# Altium PCB PCB11_VZ.PcbDoc
Units mm, origin at the board's own origin, x right, y up, seen from the top; angles counter-clockwise.
Board outline 69.98 x 50.04 mm, 2 copper layers (Top Layer, Bottom Layer); 12 components, 10 nets, 62 pads, 73 vias.
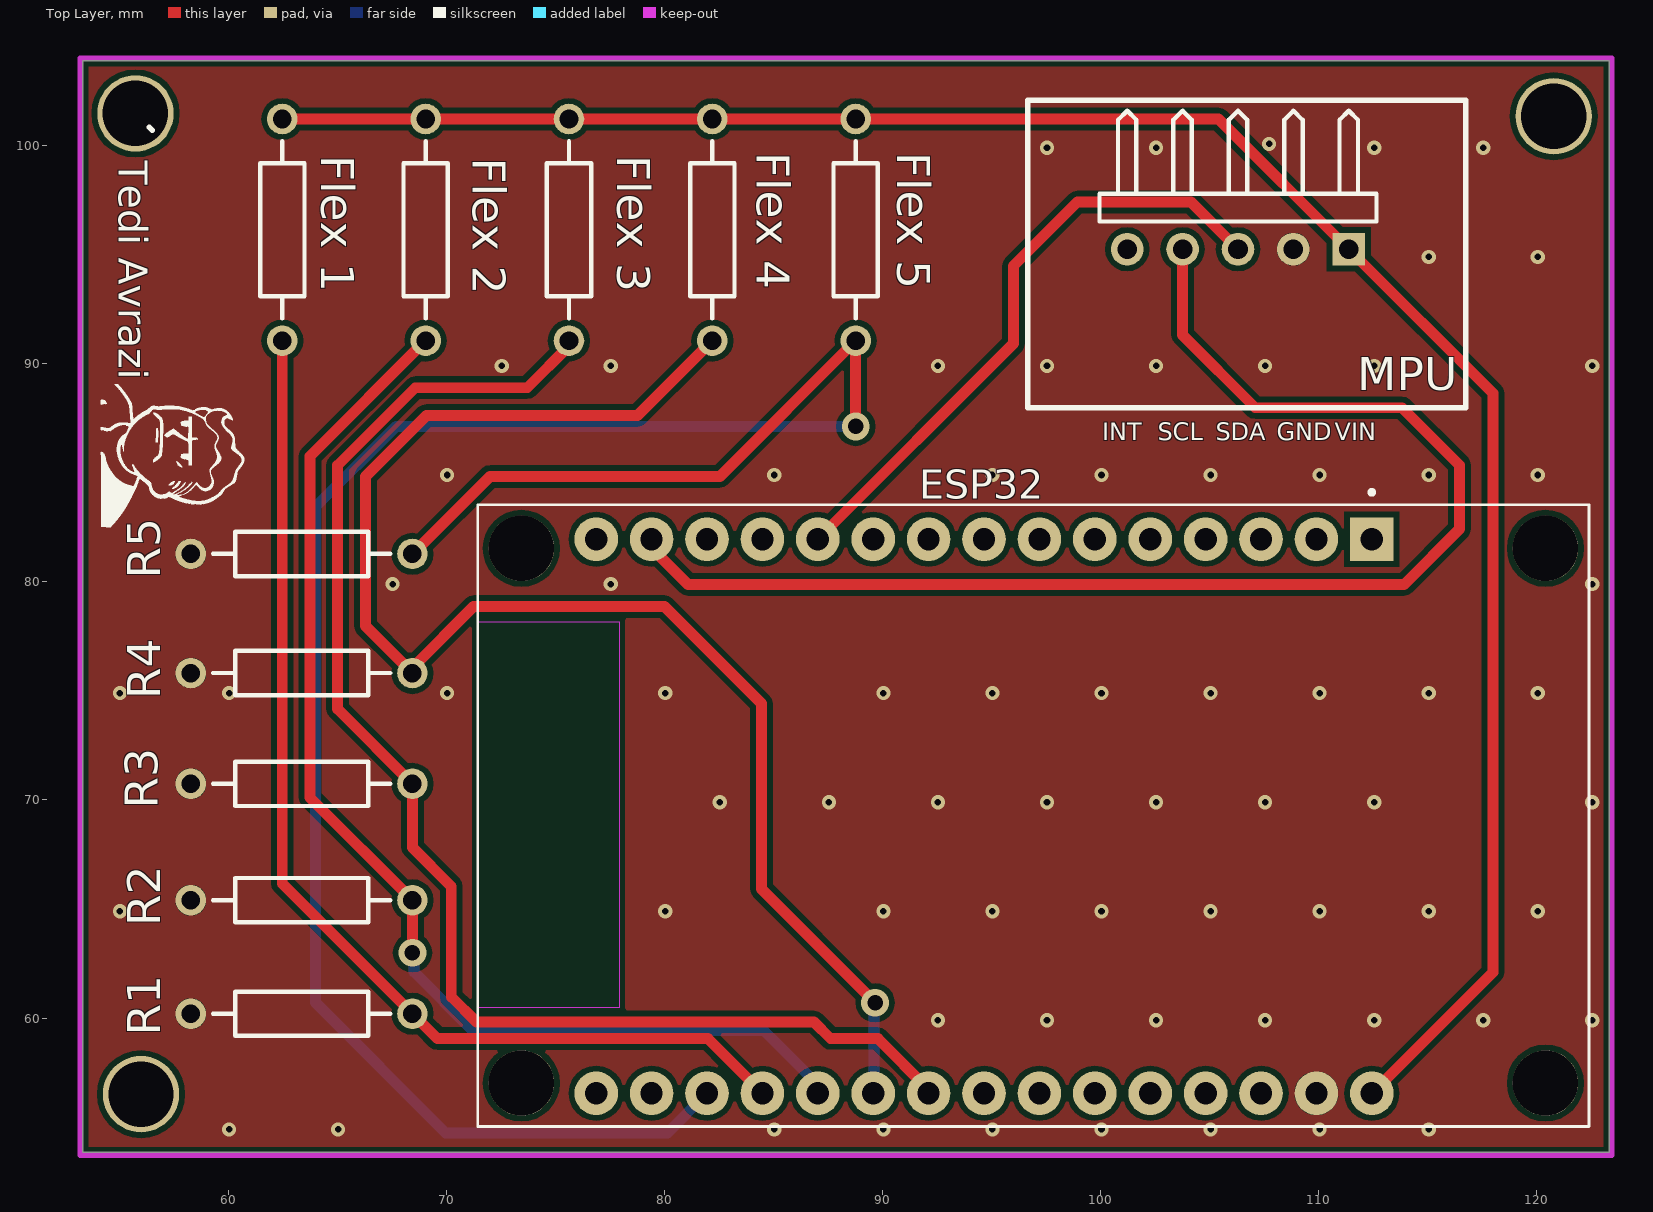
[diagram p0: Top Layer view]
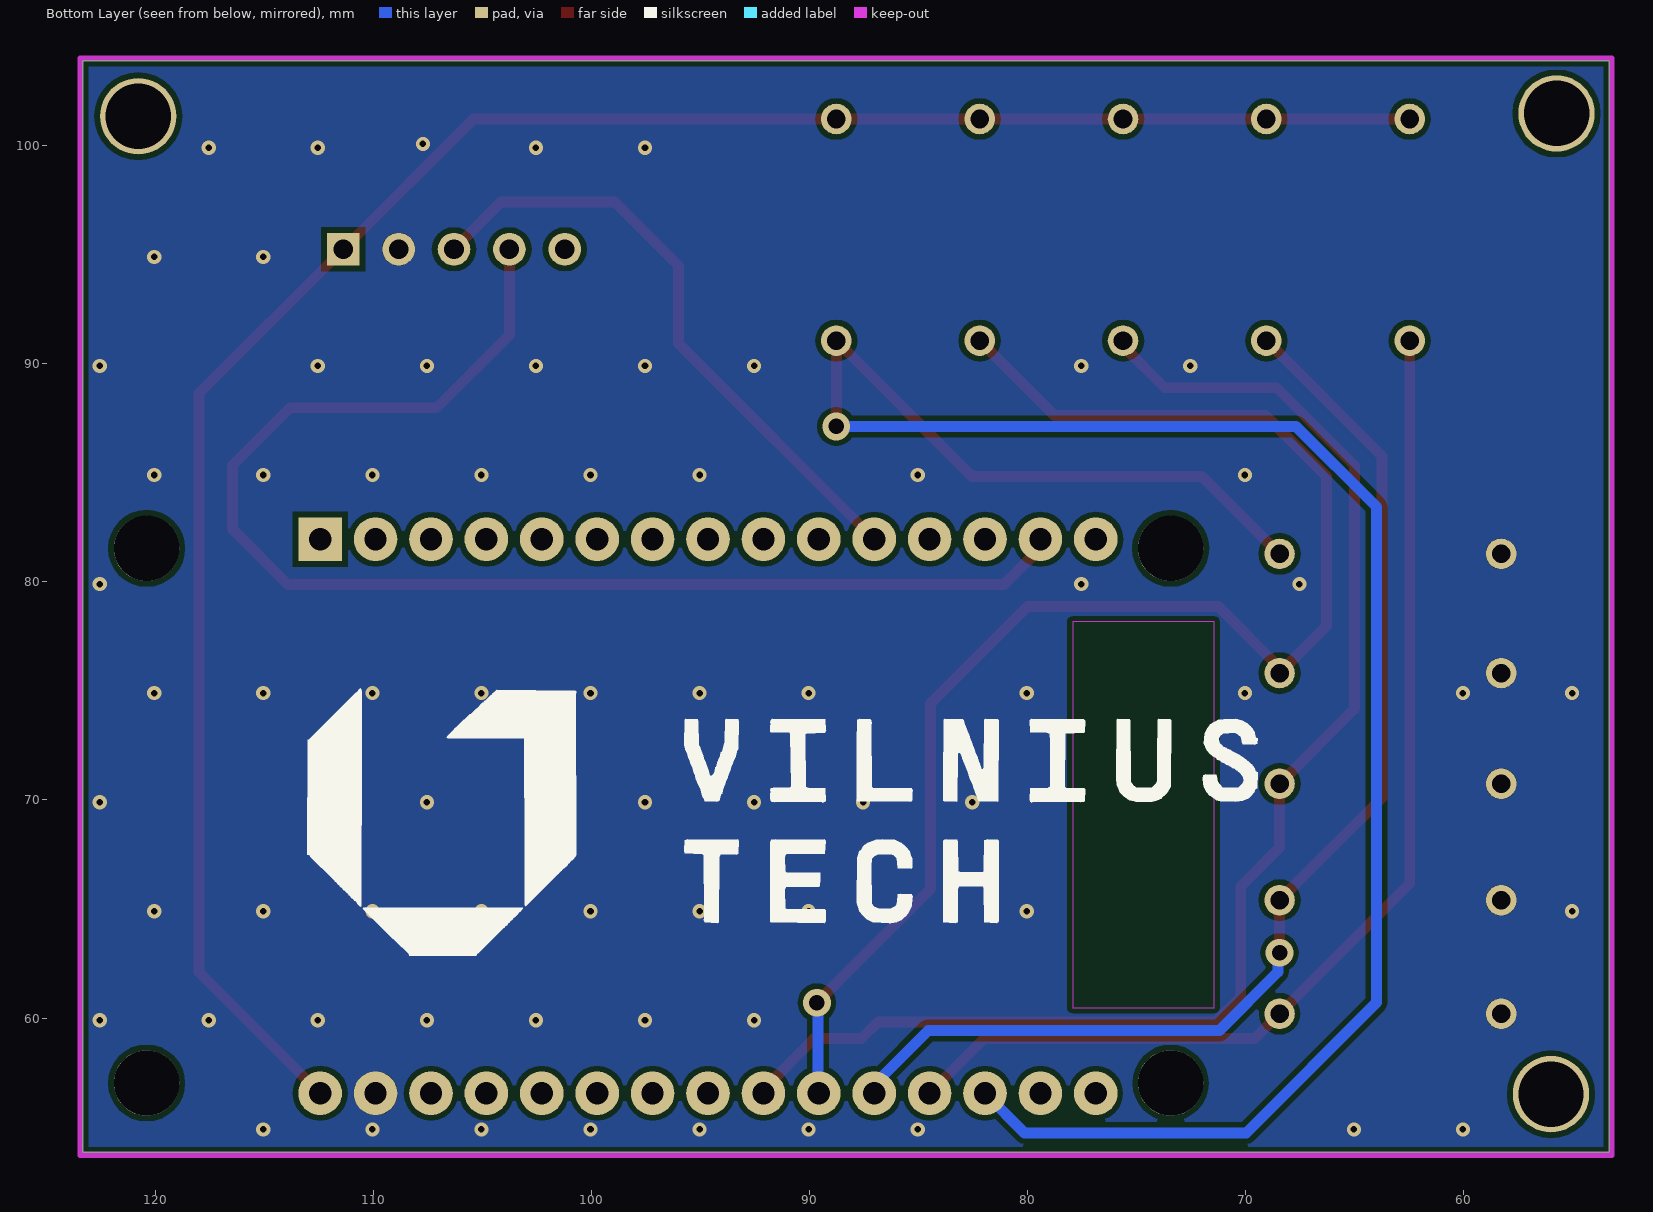
[diagram p1: Bottom Layer view, seen from below]

## Layer stack, top to bottom
Top Solder: solder mask 0.0102, Solder Resist, Dk 3.5
Top Layer: signal copper 0.0356
Dielectric 1: dielectric 0.32, FR-4, Dk 4.8
Bottom Layer: signal copper 0.0356
Bottom Solder: solder mask 0.0102, Solder Resist, Dk 3.5

## Board outline
53.34,53.848 53.34,103.886 123.317,103.886 123.317,53.848

## Design rules (kind name [scope] priority, off if disabled: settings)
Clearance [All] p1: gap=0.254 ignorepadtopadclearanceinfootprint=FALSE except(0: Arc-Hole Track-Hole SMDPad-Hole THPad-Hole Via-Hole Fill-Hole Poly-Hole Region-Hole Text-Hole)
HoleSize [All] p1: absolutevalues=TRUE maxlimit=3 minlimit=0.025 maxpercent=80.000 minpercent=20.000
PolygonConnect [IsVia] p1: connectstyle=Direct reliefconductorwidth=0.254 reliefentries=4 polygonreliefangle="90 Angle" airgapwidth=0.254
RoomDefinition ThesisSchematic [InComponentClass('ThesisSchematic')] p1: confinementstyle=ConfineIn formatcopy=TRUE lockcomponents=FALSE outline 0,0 50.8,0 50.8,25.4 0,25.4
RoutingVias [All] p1: holewidth=0.711 width=1.27 viastyle="Through Hole" minholewidth=0.711 minwidth=1.27 maxholewidth=0.711 maxwidth=1.27
SilkToSolderMaskClearance [IsPad] p1: minsilkscreentomaskgap=0.1 clearancetoexposedcopper=TRUE
SolderMaskExpansion [All] p1: expansion=0.102 istentingtop=FALSE
Width [All] p1: maxlimit=0.55 minlimit=0.5 preferedwidth=0.5
28 further rules are at their usual default settings.

## Components (designator, comment, footprint, x,y, rotation, side; value= is the part's Value field where it differs from the comment)
ESP32 "ESP32-DEVKIT-V1" MODULE_ESP32_DEVKIT_V1 96.921,69.253 r270 top (schematic designator Microcontroller1)
"Flex 1" "Res Adj2" AXIAL-0.4 62.484,96.139 r90 top value=12K
"Flex 2" "Res Adj2" AXIAL-0.4 69.056,96.139 r90 top value=12K
"Flex 3" "Res Adj2" AXIAL-0.4 75.629,96.139 r90 top value=12K
"Flex 4" "Res Adj2" AXIAL-0.4 82.201,96.139 r90 top value=12K
"Flex 5" "Res Adj2" AXIAL-0.4 88.773,96.139 r90 top value=12K
MPU "MPU" HDR1X5H 111.379,95.25 r180 top (schematic designator P1)
R1 "Res2" AXIAL-0.4 63.373,60.198 r0 top value=10K
R2 "Res2" AXIAL-0.4 63.373,65.405 r0 top value=10K
R3 "Res2" AXIAL-0.4 63.373,70.739 r0 top value=10K
R4 "Res2" AXIAL-0.4 63.373,75.819 r0 top value=10K
R5 "Res2" AXIAL-0.4 63.373,81.28 r0 top value=10K

## Footprints (in the part's own frame and the unit in brackets; to place one, negate y for a bottom-side part, rotate by r counter-clockwise, add the part's x,y. Pads: shape width x height; smd on the part's side, far side on the other; paste and mask are expansions set on the pad)
AXIAL-0.4 [mm] "Axial Device, Thru-Hole; 2 Leads; 0.4 in Pin Spacing"
  round 1.4 hole 0.85: 1(-5.08,0) 2(5.08,0)
  silkscreen extent -4.06,-1.02 4.06,1.02
HDR1X5H [mm] "Connector; Header; 5 Position; Right Angle"
  rect 1.5x1.5 hole 0.9: 1(0,0)
  round 1.5 hole 0.9: 2(2.54,0) 3(5.08,0) 4(7.62,0) 5(10.16,0)
  silkscreen extent -1.27,-6.35 11.43,-1.27
MODULE_ESP32_DEVKIT_V1 [mm]
  rect 2x2 hole 1.02: 1(-12.7,15.515)
  round 2 hole 1.02: 2(-12.7,12.975) 3(-12.7,10.435) 4(-12.7,7.895) 5(-12.7,5.355) 6(-12.7,2.815) 7(-12.7,0.275) 8(-12.7,-2.265) 9(-12.7,-4.805) 10(-12.7,-7.345) 11(-12.7,-9.885) 12(-12.7,-12.425) 13(-12.7,-14.965) 14(-12.7,-17.505) 15(-12.7,-20.045) 16(12.7,-20.045) 17(12.7,-17.505) 18(12.7,-14.965) 19(12.7,-12.425) 20(12.7,-9.885) 21(12.7,-7.345) 22(12.7,-4.805) 23(12.7,-2.265) 24(12.7,0.275) 25(12.7,2.815) 26(12.7,5.355) 27(12.7,7.895) 28(12.7,10.435) 29(12.7,12.975) 30(12.7,15.515)
  round 3 hole 3 unplated: ""(-12.28,23.475) ""(-12.28,-23.475) ""(12.23,23.475) ""(12.23,-23.475)
  Keep-Out Layer region: 8.78,-25.475 -8.91,-25.475 -8.91,-18.985 8.78,-18.985
  Keep-Out Layer region: 8.78,-25.475 -8.91,-25.475 -8.91,-18.985 8.78,-18.985
  Keep-Out Layer region: 8.78,-25.475 -8.91,-25.475 -8.91,-18.985 8.78,-18.985
  silkscreen extent -14.95,-25.48 14.23,25.48

## Part data
ESP32: library part CMP-003-000000-1, "Dual core, Wi-Fi: 2.4 GHz up to 150 Mbits/s,BLE (Bluetooth Low Energy) and legacy Bluetooth, 32 bits, Up to 240 MHz", Package=None, Availability="Not in stock", Check_prices=https://www.snapeda.com/parts/ESP32-DEVKIT-V1/Do+it/view-part/?ref=eda, Component Type=Standard, Design Item ID=ESP32-DEVKIT-V1, MF="Do it", MP=ESP32-DEVKIT-V1, Pin Count=30, Price=None, SnapEDA_Link=https://www.snapeda.com/parts/ESP32-DEVKIT-V1/Do+it/view-part/?ref=snap, Source=ESP32-DEVKIT-V1.SchLib
"Flex 1" "Flex 2": "Flex Sensor 2", LatestRevisionDate=17-Jul-2002, LatestRevisionNote="Re-released for DXP Platform.", PackageDescription="Axial Device, Thru-Hole; 2 Leads; 0.6 in Pin Spacing", PackageReference=AXIAL-0.6, Published=8-Jun-2000, Publisher="Altium Limited", Set Position=0.5
"Flex 3" "Flex 4" "Flex 5": "Variable Resistor", LatestRevisionDate=17-Jul-2002, LatestRevisionNote="Re-released for DXP Platform.", PackageDescription="Axial Device, Thru-Hole; 2 Leads; 0.6 in Pin Spacing", PackageReference=AXIAL-0.6, Published=8-Jun-2000, Publisher="Altium Limited", Set Position=0.5
MPU: library part "Header 5H", "Header, 5-Pin, Right Angle", LatestRevisionDate=17-Jul-2002, LatestRevisionNote="Re-released for DXP Platform.", Publisher="Altium Limited"
R1 R2 R3 R4 R5: "Resistor", LatestRevisionDate=17-Jul-2002, LatestRevisionNote="Re-released for DXP Platform.", PackageDescription="Axial Device, Thru-Hole; 2 Leads; 0.4 in Pin Spacing", PackageReference=AXIAL-0.4, Published=8-Jun-2000, Publisher="Altium Limited"

## Free pads (board coordinates)
  round 3.5 hole 3: 1(56.007,56.515) 2(55.753,101.473) 3(120.777,101.346)

## Via types
v1: diameter 0.65, hole 0.3, Top Layer to Bottom Layer, 70 vias
v2: diameter 1.27, hole 0.711, Top Layer to Bottom Layer, 2 vias
v3: diameter 1.27, hole 0.711, Top Layer to Bottom Layer, tented both sides, 1 vias

## Nets (pads, with @x,y where several pads share a name; then routed paths per layer and width w, separated by ;. In a path a pad name is that pad's centre, name@x,y a point inside that pad or via, vN(x,y) a via of type N, cw(c..) or ccw(c..) an arc to the next point about the centre after c; other vN are vias at no path point)
GND: ESP32.29 MPU.2 R1.1 R2.1 R3.1 R4.1 R5.1
  other v1: 60.043,54.897 65.043,54.897 85.043,54.897 90.043,54.897 95.043,54.897 100.043,54.897 105.043,54.897 110.043,54.897 115.043,54.897 92.543,59.897 97.543,59.897 102.543,59.897 107.543,59.897 112.543,59.897 117.543,59.897 122.543,59.897 55.043,64.897 80.043,64.897 90.043,64.897 95.043,64.897 100.043,64.897 105.043,64.897 110.043,64.897 115.043,64.897 120.043,64.897 82.543,69.897 87.543,69.897 92.543,69.897 97.543,69.897 102.543,69.897 107.543,69.897 112.543,69.897 122.543,69.897 55.043,74.897 60.043,74.897 70.043,74.897 80.043,74.897 90.043,74.897 95.043,74.897 100.043,74.897 105.043,74.897 110.043,74.897 115.043,74.897 120.043,74.897 67.543,79.897 77.543,79.897 122.543,79.897 70.043,84.897 85.043,84.897 95.043,84.897 100.043,84.897 105.043,84.897 110.043,84.897 115.043,84.897 120.043,84.897 72.543,89.897 77.543,89.897 92.543,89.897 97.543,89.897 102.543,89.897 107.543,89.897 112.543,89.897 122.543,89.897 115.043,94.897 120.043,94.897 97.543,99.897 102.543,99.897 112.543,99.897 117.543,99.897 107.724,100.078
INT: MPU.5
NetESP32_18: "Flex 5.1" ESP32.18 R5.2 | length 98.5
  Top Layer w0.5: R5.2 72.009,84.836 82.55,84.836 88.773,91.059 v2(88.773,87.122)
  Bottom Layer w0.5: ESP32.18 80.14,54.737 69.977,54.737 64.008,60.706 64.008,83.439 67.691,87.122 v2(88.773,87.122)
NetESP32_19: "Flex 1.1" ESP32.19 R1.2 | length 50.9
  Top Layer w0.5: 62.484,91.059 62.484,66.167 R1.2 69.596,59.055 81.994,59.055 ESP32.19
NetESP32_20: "Flex 2.1" ESP32.20 R2.2 | length 54.2
  Top Layer w0.254: ESP32.20@87.016,56.574 ESP32.20
  Top Layer w0.5: v2(68.453,62.992) R2.2 63.754,70.104 63.754,85.757 69.056,91.059
  Bottom Layer w0.5: v2(68.453,62.992) 68.532,62.913 68.532,62.112 71.208,59.436 84.559,59.436 87.036,56.959 ESP32.20
NetESP32_21: "Flex 4.1" ESP32.21 R4.2 | length 67.7
  Top Layer w0.5: 82.201,91.059 78.772,87.63 69.088,87.63 66.294,84.836 66.294,77.978 R4.2 68.453,76.063 71.257,78.867 80.01,78.867 84.455,74.422 84.455,65.913 v3(89.662,60.706)
  Bottom Layer w0.5: ESP32.21 89.619,56.596 89.619,60.663 v3(89.662,60.706)
NetESP32_22: "Flex 3.1" ESP32.22 R3.2 | length 63.5
  Top Layer w0.5: 75.629,91.059 75.629,90.815 73.713,88.9 68.58,88.9 65.024,85.344 65.024,74.168 R3.2 68.453,67.818 70.231,66.04 70.231,60.975 71.389,59.817 86.868,59.817 87.63,59.055 89.789,59.055 92.116,56.728 ESP32.22
SCL: ESP32.14 MPU.4 | length 61.2
  Top Layer w0.5: ESP32.14 79.416,81.547 81.08,79.883 113.919,79.883 116.459,82.423 116.459,85.344 113.822,87.981 107.091,87.981 103.759,91.313 MPU.4
SDA: ESP32.11 MPU.3 | length 28.6
  Top Layer w0.5: ESP32.11 96.012,90.929 96.012,94.488 98.933,97.409 104.14,97.409 MPU.3
VIN: "Flex 1.2" "Flex 2.2" "Flex 3.2" "Flex 4.2" "Flex 5.2" ESP32.30 MPU.1 | length 95.1
  Top Layer w0.5: 62.484,101.219 69.056,101.219 75.629,101.219 82.201,101.219 88.773,101.219 105.41,101.219 MPU.1 117.983,88.646 117.983,62.1 ESP32.30
pads on no net: ESP32. ESP32.1 ESP32.2 ESP32.3 ESP32.4 ESP32.5 ESP32.6 ESP32.7 ESP32.8 ESP32.9 ESP32.10 ESP32.12 ESP32.13 ESP32.15 ESP32.16 ESP32.17 ESP32.23 ESP32.24 ESP32.25 ESP32.26 ESP32.27 ESP32.28
copper on no net: | length 0.4
  Top Layer w0.5: 99.736,56.553 99.736,56.937

## Polygon pours and split planes (outlines as drawn)
GND on Bottom Layer "GND_L02_P003" (solid, pour order 3): 53.594,103.886 53.34,103.632 53.34,53.848 123.317,53.848 123.317,103.886
GND on Top Layer "GND_L01_P002" (solid, pour order 2): 53.34,103.886 53.34,53.848 123.317,53.848 123.317,103.886

## Keep-outs
Keep-Out Layer:
  lines w0.254: 53.213,53.721 123.444,53.721 123.444,104.013 53.213,104.013 53.213,53.721

## Silkscreen, mask and mechanical layers (free items; w line width, h text height)
Top Overlay:
  drawing of 13 lines, arcs and shapes, not listed
  text "Tedi Avrazi" at 54.991,99.314 h1.32 r270
  text "INT" at 100.076,86.487 h0.8
  text "SCL" at 102.616,86.487 h0.8
  text "SDA" at 105.283,86.487 h0.8
  text "GND" at 108.077,86.487 h0.8
  text "VIN" at 110.744,86.487 h0.8
Bottom Overlay:
  drawing of 14 lines, arcs and shapes, not listed
Mechanical 1:
  lines w0.013: 112.713,87.981 116.713,87.981 ; 114.713,87.981 116.713,87.981 ; 116.713,87.981 96.713,87.981 96.713,101.981 116.713,101.981 116.713,87.981
Mechanical 14:
  lines w0.254: 53.213,53.721 53.213,104.013 123.444,104.013 123.444,53.721 53.213,53.721